# Altium PCB ICAN-7006-MIC.PcbDoc
Units mm, origin at the board's own origin, x right, y up, seen from the top; angles counter-clockwise.
Board outline 86.5 x 92.5 mm, 2 copper layers (Top Layer, Bottom Layer); 7 components, 12 nets, 32 pads, 0 vias.
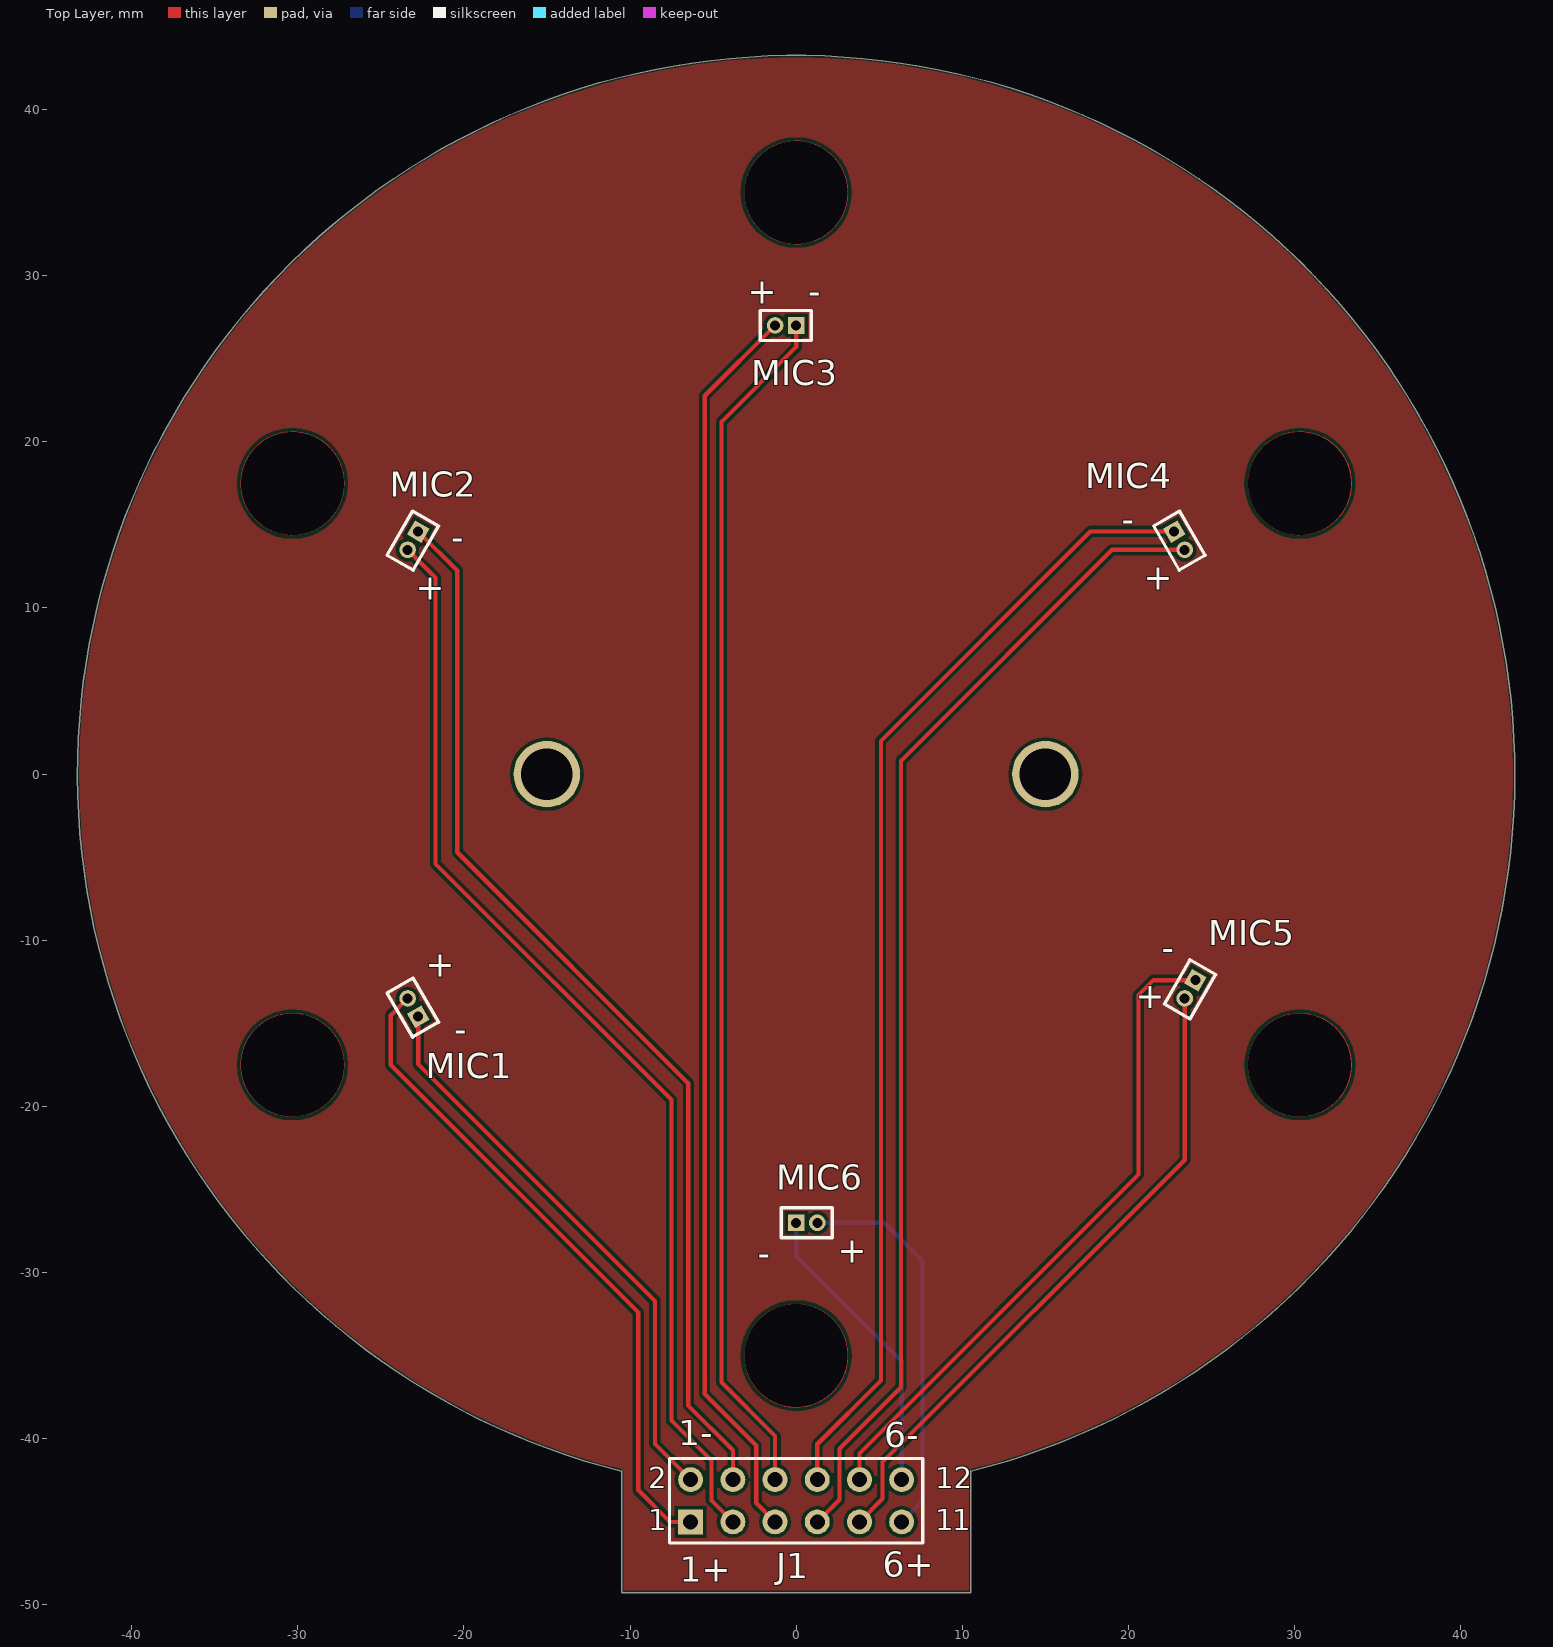
[diagram p0: Top Layer view]
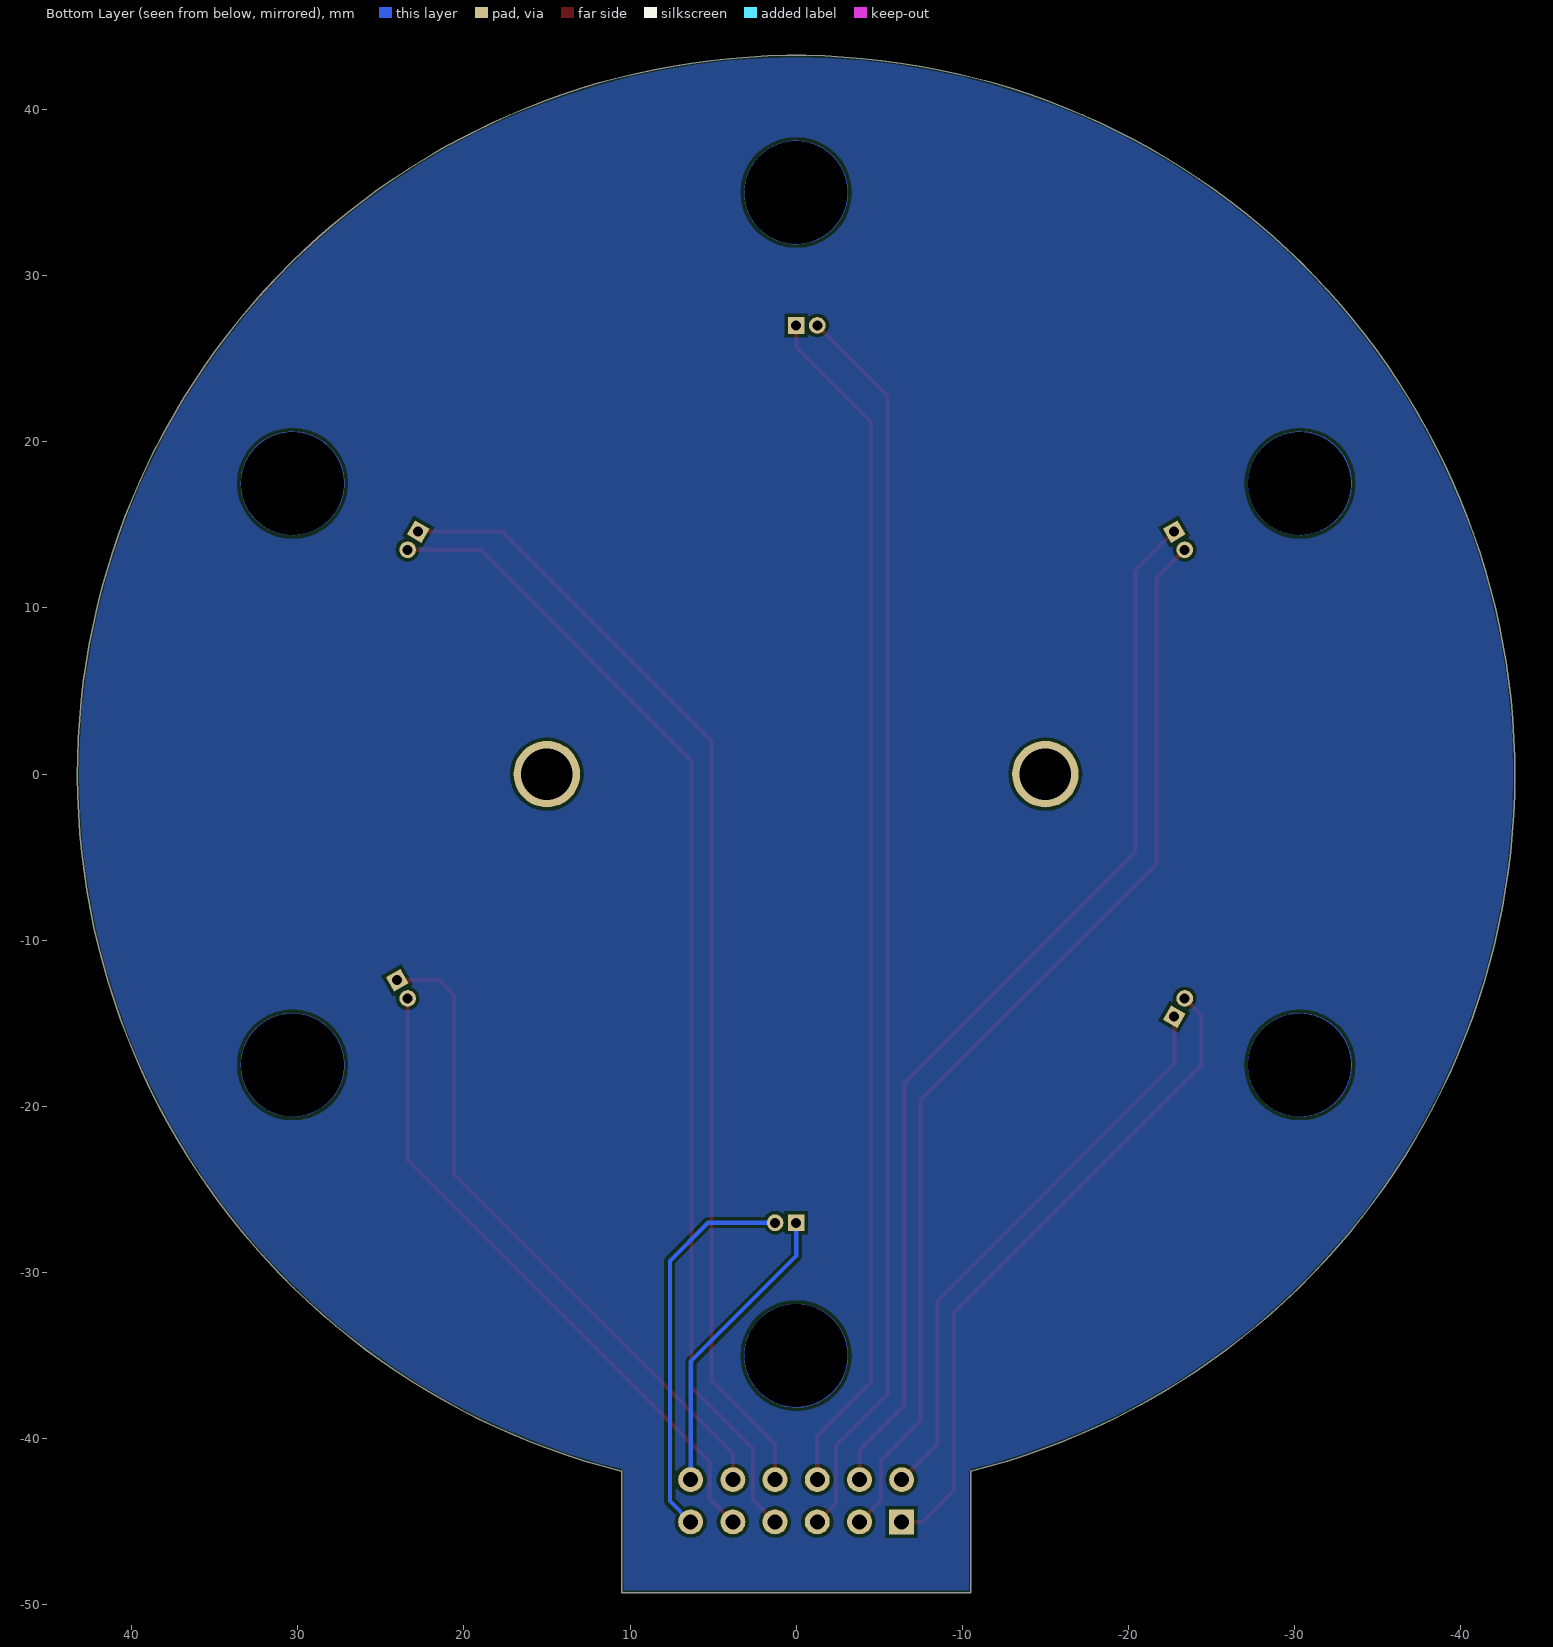
[diagram p1: Bottom Layer view, seen from below]

## Layer stack, top to bottom
Top Layer: signal copper 0.0356
Dielectric: dielectric 0.32, FR-4, Dk 4.8
Bottom Layer: signal copper 0.0356

## Board outline
-10.5,-49.25 -10.5,-41.935 -10.505,-41.955 cw(c0,0) 10.505,-41.955 10.5,-41.935 10.5,-49.25

## Design rules (kind name [scope] priority, off if disabled: settings)
Clearance [All] p1: gap=0.2
ComponentClearance [All] p1: gap=0.2 collisioncheckmode=3 verticalgap=0.2
HoleSize [All] p1: absolutevalues=TRUE maxlimit=8 minlimit=0.025 maxpercent=80.000 minpercent=20.000
PolygonConnect [All] p1: connectstyle=Relief reliefconductorwidth=0.254 reliefentries=4 polygonreliefangle="90 Angle"
RoutingVias [All] p1: holewidth=0.2 width=0.4 viastyle="Through Hole" minholewidth=0.2 minwidth=0.4 maxholewidth=4 maxwidth=8
SolderMaskExpansion [All] p1: expansion=0.102
TestPointUsage [All] p1: valid=0 allowmultiple=FALSE
Testpoint [All] p1: side=15 testpointundercomponent=TRUE minsize=1.016 maxsize=2.54 preferedsize=1.524 minholesize=0 maxholesize=1.016 preferedholesize=0.813 testpointgrid=0.025 style=1023 order=0-112345678
Width [All] p1: maxlimit=2 minlimit=0.2 preferedwidth=0.254
17 further rules are at their usual default settings.

## Components (designator, comment, footprint, x,y, rotation, side; value= is the part's Value field where it differs from the comment)
J1 "YH 12P" HDR2X6 -6.35,-45 r0 top
MIC1 "Not Mount(HOLE)" MHDR1X2 -22.748,-14.6 r120 top
MIC2 "Not Mount(HOLE)" MHDR1X2 -22.748,14.6 r240 top
MIC3 "Not Mount(HOLE)" MHDR1X2 0,27 r180 top
MIC4 "Not Mount(HOLE)" MHDR1X2 22.748,14.6 r300 top
MIC5 "Not Mount(HOLE)" MHDR1X2 24.018,-12.4 r240 top
MIC6 "Not Mount(HOLE)" MHDR1X2 0,-27 r0 top

## Footprints (in the part's own frame and the unit in brackets; to place one, negate y for a bottom-side part, rotate by r counter-clockwise, add the part's x,y. Pads: shape width x height; smd on the part's side, far side on the other; paste and mask are expansions set on the pad)
HDR2X6 [mm] "Connector; Header; 6x2 Position"
  rect 1.5x1.5 hole 0.9: 1(0,0)
  round 1.5 hole 0.9: 2(0,2.54) 3(2.54,0) 4(2.54,2.54) 5(5.08,0) 6(5.08,2.54) 7(7.62,0) 8(7.62,2.54) 9(10.16,0) 10(10.16,2.54) 11(12.7,0) 12(12.7,2.54)
  silkscreen extent -1.27,-1.27 13.97,3.81
MHDR1X2 [mm] "Connector; Header; 2 Position"
  rect 1x1 hole 0.6: 1(0,0)
  round 1 hole 0.6: 2(1.27,0)
  silkscreen extent -0.9,-0.9 2.17,0.9

## Part data
J1: library part "Header 12", "Header, 12-Pin"
MIC1 MIC2 MIC3 MIC4 MIC5 MIC6: library part "Header 2", "Header, 2-Pin"

## Free pads (board coordinates)
  round 1.524 hole 6.2: 0(-30.3,-17.5) 0(-30.3,17.5) 0(0,-35) 0(0,35) 0(30.3,-17.5) 0(30.3,17.5)
  round 4 hole 3.1: 0(15,0) 1(-15,0)

## Nets (pads, with @x,y where several pads share a name; then routed paths per layer and width w, separated by ;. In a path a pad name is that pad's centre, name@x,y a point inside that pad or via, vN(x,y) a via of type N, cw(c..) or ccw(c..) an arc to the next point about the centre after c; other vN are vias at no path point)
MIC1+: J1.2 MIC1.1 | length 34.7
  Top Layer w0.254: MIC1.1 -22.748,-17.452 -8.5,-31.7 -8.5,-40.31 J1.2
MIC1-: J1.1 MIC1.2 | length 40.1
  Top Layer w0.254: MIC1.2 -24.4,-14.517 -24.4,-17.5 -9.5,-32.4 -9.5,-43.1 -7.6,-45 J1.1
MIC2+: J1.4 MIC2.1 | length 64.9
  Top Layer w0.254: MIC2.1 -20.4,12.252 -20.4,-4.7 -6.5,-18.6 -6.5,-38 -3.81,-40.69 J1.4
MIC2-: J1.3 MIC2.2 | length 66.6
  Top Layer w0.254: MIC2.2 -21.7,11.817 -21.7,-5.4 -7.5,-19.6 -7.5,-38.9 -5.1,-41.3 -5.1,-43.71 J1.3
MIC3+: J1.6 MIC3.1 | length 72.7
  Top Layer w0.254: J1.6 -1.27,-39.83 -4.5,-36.6 -4.5,21.2 0,25.7 MIC3.1
MIC3-: J1.5 MIC3.2 | length 75.5
  Top Layer w0.254: J1.5 -2.4,-43.87 -2.4,-40.4 -5.5,-37.3 -5.5,22.77 MIC3.2
MIC4+: J1.8 MIC4.1 | length 68.9
  Top Layer w0.254: J1.8 1.27,-40.33 5.1,-36.5 5.1,2 17.7,14.6 MIC4.1
MIC4-: J1.7 MIC4.2 | length 70.2
  Top Layer w0.254: J1.7 2.6,-43.67 2.6,-40.6 6.3,-36.9 6.3,0.8 19,13.5 MIC4.2
MIC5+: J1.10 MIC5.1 | length 39.9
  Top Layer w0.254: J1.10 3.81,-40.89 20.6,-24.1 20.6,-13.3 21.5,-12.4 MIC5.1
MIC5-: J1.9 MIC5.2 | length 39.6
  Top Layer w0.254: J1.9 5.2,-43.61 5.2,-41.4 23.383,-23.217 MIC5.2
MIC6+: J1.12 MIC6.1 | length 18.1
  Bottom Layer w0.254: MIC6.1 0,-29 6.35,-35.35 J1.12
MIC6-: J1.11 MIC6.2 | length 23.5
  Bottom Layer w0.254: MIC6.2 5.3,-27 7.6,-29.3 7.6,-43.75 J1.11

## Polygon pours and split planes (outlines as drawn)
no net on Top Layer "Top Layer-No Net" (solid, pour order 1000): -10.54,-41.815 -10.373,-41.935 -10.373,-49.123 10.373,-49.123 10.373,-41.935 10.54,-41.815 ccw(c0,0) 43.123,0 ccw(c0,0)
no net on Bottom Layer "Bottom Layer-No Net" (solid, pour order 1001): -10.54,-41.815 -10.373,-41.935 -10.373,-49.123 10.373,-49.123 10.373,-41.935 10.54,-41.815 ccw(c0,0) 43.123,0 ccw(c0,0)

## Other copper
Multi-Layer:
  circle w0.254: c-30.311,17.5 r3
  circle w0.254: c-30.311,-17.5 r3
  circle w0.254: c0,-35 r3
  circle w0.254: c30.311,-17.5 r3
  circle w0.254: c30.311,17.5 r3
  circle w0.254: c0,35 r3

## Silkscreen, mask and mechanical layers (free items; w line width, h text height)
Top Overlay:
  text "+" at -2.9,28.3 h1.52
  text "-" at 0.73,28.3 h1.52
  text "-" at 19.6,14.6 h1.52
  text "-" at -20.77,13.5 h1.52
  text "+" at 20.93,11.1 h1.52
  text "+" at -22.9,10.5 h1.52
  text "-" at 22,-11.2 h1.52
  text "+" at -22.3,-12.2 h1.52
  text "+" at 20.43,-14.1 h1.52
  text "-" at -20.57,-16.1 h1.52
  text "+" at 2.5,-29.4 h1.52
  text "-" at -2.3,-29.6 h1.52
  text "1-" at -7.1,-40.4 h1.52
  text "6-" at 5.3,-40.5 h1.52
  text "6+" at 5.2,-48.3 h1.52
  text "1+" at -7,-48.6 h1.52
Mechanical 1:
  circle w0.254: c0,0 r35
  circle w0.254: c0,0 r27
  lines w0.254: -10.505,-41.955 cw(c0,0) 10.505,-41.955 ; -10.5,-41.935 -10.5,-49.25 10.5,-49.25 10.5,-41.935
Mechanical 13:
  lines w0.254: -43.25,-55.254 -43.25,-54.746 ; -41.726,-55.508 -43.25,-55 ; -41.726,-54.492 -43.25,-55 ; -15,49.746 -15,50.254 ; -13.476,49.492 -15,50 ; -13.476,50.508 -15,50 ; -10.476,-52.062 -10.476,-51.554 ; -8.952,-52.316 -10.476,-51.808 ; -8.952,-51.3 -10.476,-51.808 ; -6.5,-55 -43.25,-55 ; -5.104,50 -15,50 ; -4.953,-51.808 -10.476,-51.808 ; 5.001,-51.808 10.524,-51.808 ; 5.104,50 15,50 ; 6.5,-55 43.25,-55 ; 9,-52.316 10.524,-51.808 ; 9,-51.3 10.524,-51.808 ; 10.524,-52.062 10.524,-51.554 ; 13.476,49.492 15,50 ; 13.476,50.508 15,50 ; 15,49.746 15,50.254 ; 41.726,-55.508 43.25,-55 ; 41.726,-54.492 43.25,-55 ; 43.25,-55.254 43.25,-54.746 ; 51.3,-47.726 51.808,-49.25 ; 51.3,41.726 51.808,43.25 ; 51.554,-49.25 52.062,-49.25 ; 51.554,43.25 52.062,43.25 ; 51.808,-9.5 51.808,-49.25 ; 51.808,3.5 51.808,43.25 ; 52.316,-47.726 51.808,-49.25 ; 52.316,41.726 51.808,43.25
  text "30 (mm)" at -4.85,49.086 h1.52
  text "92.5 (mm)" at 52.722,-9.246 h1.52 r90
  text "21 (mm)" at -4.699,-52.722 h1.52
  text "86.5 (mm)" at -6.246,-55.914 h1.52

## Text inside footprints (layer, text, board x,y; h text height)
J1: Top Overlay "2" at -8.89,-42.968 h1.27; Top Overlay "1" at -8.89,-45.508 h1.27; Top Overlay "1" at 8.382,-45.508 h1.27; Top Overlay "1" at 9.398,-45.508 h1.27; Top Overlay "12" at 8.382,-42.968 h1.27